# Altium PCB Alsoran PCB-20180114-version2.PcbDoc (part 2 of 4)
Units mil, origin at the board's own origin, x right, y up, seen from the top; angles counter-clockwise.
Board outline 15223.67 x 4104.31 mil, 2 copper layers (Top Layer, Bottom Layer); 293 components, 222 nets, 1561 pads, 240 vias.
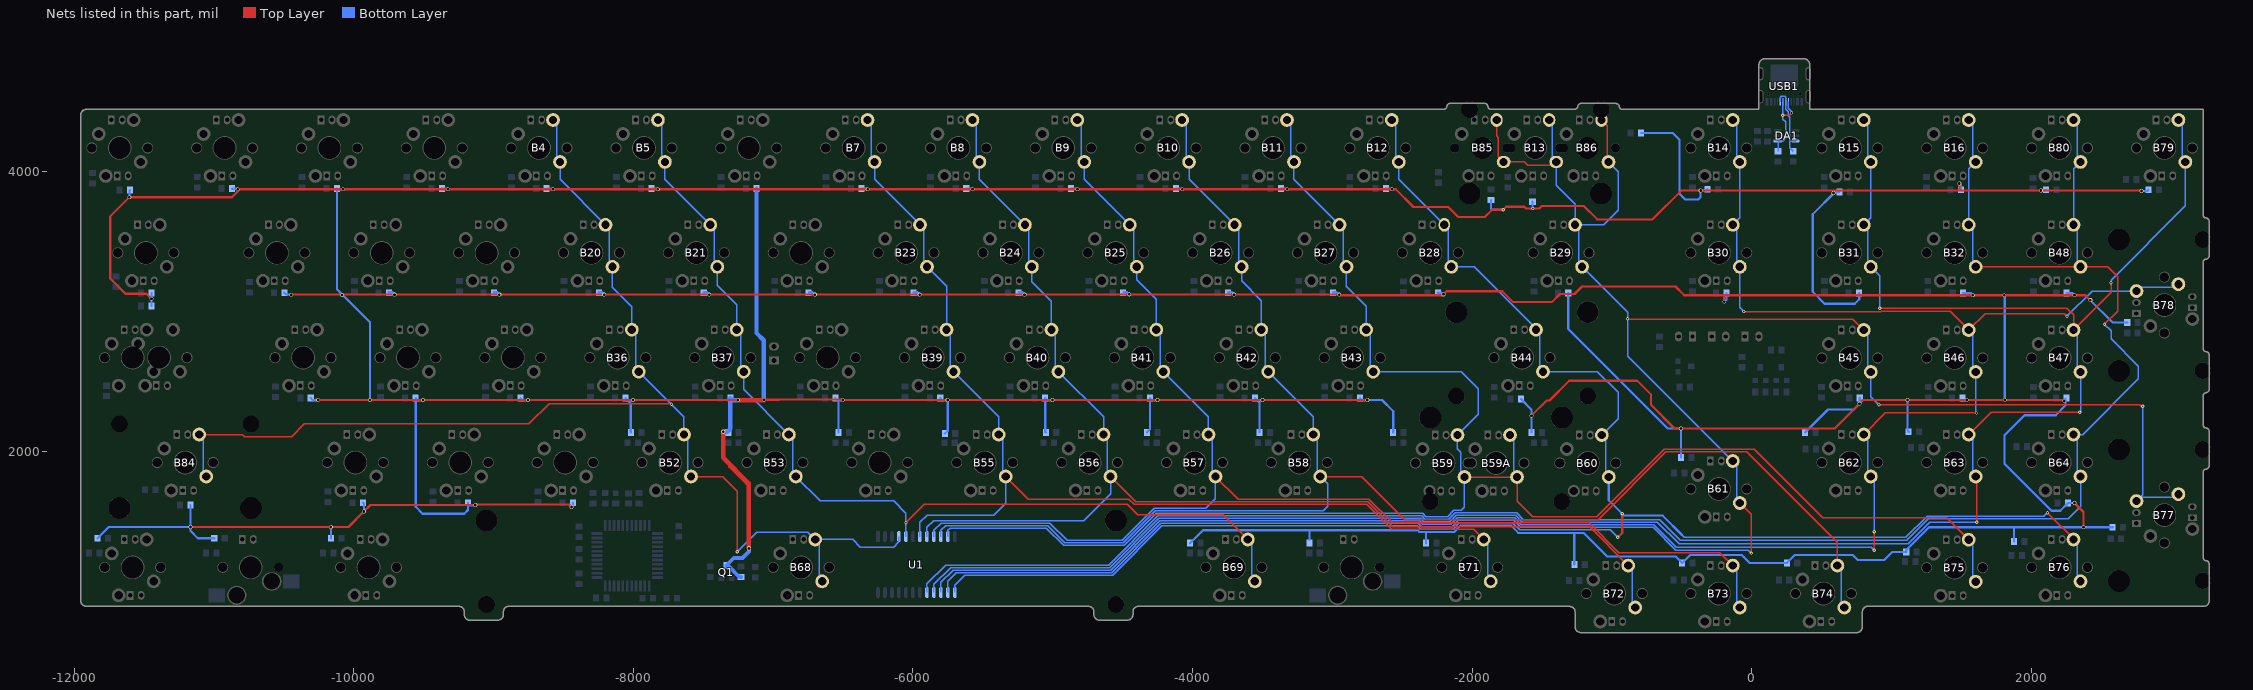
[diagram p2: the nets of this part, all layers, seen from the top]

## Via types
v1: diameter 23.62, hole 11.81, Top Layer to Bottom Layer, 150 vias
v2: diameter 27.56, hole 19.68, Top Layer to Bottom Layer, 63 vias
v3: diameter 39.37, hole 23.62, Top Layer to Bottom Layer, 12 vias
v4: diameter 24.41, hole 11.81, Top Layer to Bottom Layer, tented both sides, 10 vias
v5: diameter 23.62, hole 11.81, Top Layer to Bottom Layer, tented both sides, 3 vias
v6: diameter 31.5, hole 19.68, Top Layer to Bottom Layer, 2 vias

## Nets (pads, with @x,y where several pads share a name; then routed paths per layer and width w, separated by ;. In a path a pad name is that pad's centre, name@x,y a point inside that pad or via, vN(x,y) a via of type N, cw(c..) or ccw(c..) an arc to the next point about the centre after c; other vN are vias at no path point) (continued)
COL_4: B4.1 B20.1 B36.1 B52.1 B68.1 B84.1 U1.4 | length 9202.7
  Top Layer w10: B84.1@-11104.72,2119.29 -10796.65,2119.29 -10780.83,2103.46 -10443.78,2103.46 -10352.36,2194.88 -8746.64,2194.88 -8602.94,2338.58 -7730.31,2338.58 v1(-7726.78,2335.05) ; B52.1@-7587.53,1819.29 -7360.63,1819.29 -7255.91,1714.57 v1(-7255.91,1281.5)
  Bottom Layer w10: B84.1@-11104.72,2119.29 -11076.77,2091.34 -11076.77,1841.34 B84.1@-11054.72,1819.29 ; B4.1@-8573.89,4369.29 -8545.93,4341.34 -8545.93,4091.34 B4.1@-8523.89,4069.29 -8523.89,3943.91 B20.1@-8199.26,3619.29 -8171.31,3591.34 -8171.31,3341.34 B20.1@-8149.26,3319.29 -8149.26,3172.88 -8011.02,3034.65 -8011.02,2970.62 B36.1@-8011.02,2869.29 -7983.07,2841.34 -7983.07,2591.34 B36.1@-7961.02,2569.29 -7637.53,2245.8 B52.1@-7637.53,2119.29 -7609.58,2091.34 -7609.58,1841.34 B52.1@-7587.53,1819.29 ; v1(-7255.91,1281.5) -7116.14,1421.26 -6889.75,1421.26 -6751.18,1421.26 B68.1@-6699.21,1369.29 ; B68.1@-6649.21,1069.29 -6671.26,1091.34 -6671.26,1341.34 B68.1@-6699.21,1369.29 ; U1.4@-6100,1389.76 -6100,1351.38 -6136.42,1314.96 -6375.98,1314.96 -6430.32,1369.29 B68.1@-6699.21,1369.29
COL_5: B5.1 B21.1 B37.1 B53.1 B69.1 U1.5 | length 6991
  Top Layer w10: v1(-6050,1488.19) -5918.11,1620.08 -4468.48,1620.08 -4393.68,1545.28 -3780.71,1545.28 B69.1@-3604.72,1369.29
  Bottom Layer w10: B5.1@-7824.05,4369.29 -7796.1,4341.34 -7796.1,4091.34 B5.1@-7774.05,4069.29 -7774.05,3944.06 B21.1@-7449.28,3619.29 -7421.33,3591.34 -7421.33,3341.34 B21.1@-7399.28,3319.29 -7399.28,3186.68 -7260.63,3048.03 B37.1@-7260.63,2869.29 -7232.68,2841.34 -7232.68,2591.34 B37.1@-7210.63,2569.29 -7210.63,2442.61 B53.1@-6887.31,2119.29 -6859.36,2091.34 -6859.36,1841.34 B53.1@-6837.31,1819.29 -6662.2,1644.17 -6138.27,1644.17 -6050,1555.91 v1(-6050,1488.19) U1.5@-6050,1389.76 -6050,1435 ; B69.1@-3604.72,1369.29 -3576.77,1341.34 -3576.77,1091.34 B69.1@-3554.72,1069.29
COL_7: B7.1 B23.1 B39.1 B55.1 B71.1 U1.7 | length 7847.9
  Top Layer w10: B55.1@-5336.88,1819.29 -5174.8,1657.22 -4455.06,1657.22 -4417.77,1619.92 -2753.27,1619.92 -2574.14,1440.79 -1989.21,1440.79 B71.1@-1917.72,1369.29
  Bottom Layer w10: B7.1@-6324.38,4369.29 -6296.42,4341.34 -6296.42,4091.34 B7.1@-6274.38,4069.29 -6274.38,3944.36 B23.1@-5949.31,3619.29 -5921.36,3591.34 -5921.36,3341.34 B23.1@-5899.31,3319.29 -5759.84,3179.82 B39.1@-5759.84,2869.29 -5731.89,2841.34 -5731.89,2591.34 B39.1@-5709.84,2569.29 -5386.88,2246.33 B55.1@-5386.88,2119.29 -5358.92,2091.34 -5358.92,1841.34 B55.1@-5336.88,1819.29 -5336.88,1627.69 -5421.26,1543.31 -5897.64,1543.31 -5950,1490.94 U1.7@-5950,1389.76 ; B71.1@-1917.72,1369.29 -1889.76,1341.34 -1889.76,1091.34 B71.1@-1867.72,1069.29
COL_8: B8.1 B24.1 B40.1 B56.1 B72.1 U1.8 | length 8948.1
  Top Layer w10: B56.1@-4586.66,1819.29 -4405.16,1637.8 -2879.92,1637.8 ; -2948.82,1637.8 -2879.92,1637.8 ; B72.1@-884.25,1182.28 -1160.63,1458.66 -2566.73,1458.66 -2745.87,1637.8 -2879.92,1637.8
  Bottom Layer w10: U1.8@-5900,1389.76 -5900,1456.3 -5851.89,1504.41 -5200.78,1504.41 ; B8.1@-5574.54,4369.29 -5546.59,4341.34 -5546.59,4091.34 B8.1@-5524.54,4069.29 -5524.54,3944.51 B24.1@-5199.33,3619.29 -5171.37,3591.34 -5171.37,3341.34 B24.1@-5149.33,3319.29 -5149.33,3212.32 -5009.45,3072.44 B40.1@-5009.45,2869.29 -4981.5,2841.34 -4981.5,2591.34 B40.1@-4959.45,2569.29 -4636.66,2246.5 B56.1@-4636.66,2119.29 -4608.71,2091.34 -4608.71,1841.34 B56.1@-4586.66,1819.29 -4586.66,1694.84 -4777.09,1504.41 -5200.78,1504.41 ; -5170.85,1504.41 -5200.78,1504.41 ; B72.1@-884.25,1182.28 -856.3,1154.33 -856.3,904.33 B72.1@-834.25,882.28
COL_9: B9.1 B25.1 B41.1 B57.1 B73.1 U1.9 | length 9876.8
  Top Layer w10: B57.1@-3836.44,1819.29 -3672.82,1655.67 -2738.46,1655.67 -2570.08,1487.28 -1163.97,1487.28 -952.28,1275.59 -564.96,1275.59 ; -385.83,1275.59 -564.96,1275.59 ; B73.1@-136.22,1182.28 -229.53,1275.59 -564.96,1275.59
  Bottom Layer w10: U1.9@-5850,1389.76 -5850,1435 -5798.47,1486.54 -5753.94,1486.54 -5202.75,1486.54 ; -5163.45,1486.54 -5202.75,1486.54 ; B9.1@-4824.71,4369.29 -4796.75,4341.34 -4796.75,4091.34 B9.1@-4774.71,4069.29 -4774.71,3944.65 B25.1@-4449.34,3619.29 -4421.39,3591.34 -4421.39,3341.34 B25.1@-4399.34,3319.29 -4399.34,3226.12 -4259.06,3085.83 B41.1@-4259.06,2869.29 -4231.1,2841.34 -4231.1,2591.34 B41.1@-4209.06,2569.29 -3886.44,2246.68 B57.1@-3886.44,2119.29 -3858.49,2091.34 -3858.49,1841.34 B57.1@-3836.44,1819.29 -3836.44,1660.12 -3905.81,1590.75 -4273.43,1590.75 -4501.97,1362.2 -4897.64,1362.2 -5021.97,1486.54 -5202.75,1486.54 ; B73.1@-136.22,1182.28 -108.27,1154.33 -108.27,904.33 B73.1@-86.22,882.28
COL_10: B10.1 B26.1 B42.1 B58.1 B74.1 U1.10 | length 10997.7
  Top Layer w10: B58.1@-3086.22,1819.29 -2791.73,1819.29 -2482.6,1510.16 -1100.08,1510.16 -614.17,1996.06 -35.43,1996.06 611.81,1348.82 B74.1@611.81,1182.28
  Bottom Layer w10: U1.10@-5800,1389.76 -5800,1435 -5766.34,1468.66 -5190.94,1468.66 ; -5156.04,1468.66 -5190.94,1468.66 ; B10.1@-4074.87,4369.29 -4046.92,4341.34 -4046.92,4091.34 B10.1@-4024.87,4069.29 -4024.87,3944.8 B26.1@-3699.36,3619.29 -3671.41,3591.34 -3671.41,3341.34 B26.1@-3649.36,3319.29 -3649.36,3218.26 -3508.66,3077.56 B42.1@-3508.66,2869.29 -3480.71,2841.34 -3480.71,2591.34 B42.1@-3458.66,2569.29 -3136.22,2246.85 B58.1@-3136.22,2119.29 -3108.27,2091.34 -3108.27,1841.34 B58.1@-3086.22,1819.29 -3033.46,1766.53 -3033.46,1606.3 -3066.89,1572.87 -3263.15,1572.87 -4266.02,1572.87 -4494.56,1344.33 -4913.23,1344.33 -5037.56,1468.66 -5190.94,1468.66 ; B74.1@611.81,1182.28 639.76,1154.33 639.76,904.33 B74.1@661.81,882.28
COL_11: B11.1 B27.1 B43.1 B59.1 B59A.1 B75.1 U1.11 | length 12748.7
  Top Layer w10: B59.1@-2055.41,1815.8 B59A.1@-1679.32,1815.8 -1679.32,1643.89 -1566.93,1531.5 -1108.27,1531.5 -625.83,2013.94 15.59,2013.94 505.91,1523.62 744.09,1523.62 ; 789.37,1523.62 744.09,1523.62 ; 1165.68,1523.62 1157.48,1523.62 ; B75.1@1550.79,1367.32 1394.49,1523.62 1157.48,1523.62 ; 744.09,1523.62 1157.48,1523.62
  Bottom Layer w10: U1.11@-5750,1389.76 -5750,1435 -5734.22,1450.79 -5194.87,1450.79 ; -5148.64,1450.79 -5194.87,1450.79 ; B11.1@-3325.03,4369.29 -3297.08,4341.34 -3297.08,4091.34 B11.1@-3275.03,4069.29 -3275.03,3944.95 B27.1@-2949.38,3619.29 -2921.42,3591.34 -2921.42,3341.34 B27.1@-2899.38,3319.29 -2899.38,3178.9 -2758.27,3037.8 B43.1@-2758.27,2869.29 -2730.31,2841.34 -2730.31,2591.34 B43.1@-2708.27,2569.29 -2401.97,2569.29 -2078.93,2569.29 -1958.06,2448.42 -1958.06,2263.15 B59.1@-2105.41,2115.8 -2105.41,2016.14 -2081.56,1992.29 -2081.56,1841.95 B59.1@-2055.41,1815.8 -2055.41,1600.1 -2078.86,1576.65 -2130.26,1576.65 -2173.92,1532.99 -2332.61,1532.99 -2354.62,1555 -4258.62,1555 -4487.16,1326.46 -4920.63,1326.46 -5044.96,1450.79 -5194.87,1450.79 ; B59A.1@-1729.32,2115.8 -1701.37,2087.84 -1701.37,1837.84 B59A.1@-1679.32,1815.8 ; B75.1@1550.79,1367.32 1578.74,1339.37 1578.74,1089.37 B75.1@1600.79,1067.32
COL_12: B12.1 B28.1 B44.1 B60.1 B76.1 U1.13 | length 13432.1
  Top Layer w10: v1(2114.17,1561.02) 2300.79,1374.41 B76.1@2300.79,1369.29
  Top Layer w15.75: v1(-958.66,1383.86) -927.17,1415.35 v1(-927.17,1553.15)
  Bottom Layer w10: U1.13@-5700,989.76 -5700,1043.11 -5628.94,1114.17 ; -5152.74,1114.17 -5628.94,1114.17 ; B12.1@-2575.2,4369.29 -2547.25,4341.34 -2547.25,4091.34 B12.1@-2525.2,4069.29 -2525.2,3945.1 B28.1@-2199.39,3619.29 -2171.44,3591.34 -2171.44,3341.34 B28.1@-2149.39,3319.29 -1986.93,3319.29 -1543.7,2876.07 B44.1@-1543.7,2869.29 -1515.75,2841.34 -1515.75,2591.34 B44.1@-1493.7,2569.29 -1103.99,2569.29 -955.3,2420.6 -955.3,2233.72 B60.1@-1073.23,2115.8 -1045.28,2087.84 B60.1@-1045.28,1837.84 ; -1153.7,1436.85 -1222.44,1436.85 ; v1(-958.66,1383.86) -1011.65,1436.85 -1222.44,1436.85 ; -500,1401.57 -482.28,1383.86 1102.36,1383.86 1253.94,1535.43 2088.58,1535.43 v1(2114.17,1561.02) ; B76.1@2300.79,1369.29 2328.74,1341.34 2328.74,1091.34 B76.1@2350.79,1069.29 ; -5628.94,1114.17 -4570.15,1114.17 -4218.69,1465.63 -2391.64,1465.63 -2369.63,1443.62 -2136.9,1443.62 -2093.24,1487.28 -1711.88,1487.28 -1661.45,1436.85 -1222.44,1436.85
  Bottom Layer w15.75: B60.1@-1023.23,1815.8 -1023.23,1649.21 v1(-927.17,1553.15) ; v1@-930.12,1550.2 -919.29,1539.37 -637.8,1539.37 -500,1401.57
COL_13: B13.1 B29.1 B45.1 B61.1 B77.1 B85.1 B86.1 U1.14 | length 16882.6
  Top Layer w10: B85.1@-1825.36,4369.29 -1825.36,4256.36 -1812,4243 -1812,4105.93 B85.1@-1775.36,4069.29 -1628.29,4069.29 -1604,4045 -1423.5,4045 B13.1@-1399.21,4069.29 ; B86.1@-1075.53,4369.29 -1035,4328.76 -1035,4069.29 B86.1@-1025.53,4069.29 ; v1@-888.88,2944.88 723.23,2944.88 B45.1@800.79,2867.32 ; B61.1@-86.22,1630.31 -3.94,1548.03 v1(-3.94,1271.65) ; v1(909.45,2332.68) 2775.59,2332.68 2789.37,2318.9 2791.34,2318.9 v1(2795.28,2322.83)
  Bottom Layer w10: U1.14@-5750,989.76 -5750,1070.87 -5688.82,1132.05 -5198.81,1132.05 ; -5160.14,1132.05 -5198.81,1132.05 ; B13.1@-1449.21,4369.29 -1429,4349.08 -1429,4099.08 B13.1@-1399.21,4069.29 -1399.21,3903.01 -1264.17,3767.97 B29.1@-1264.17,3619.29 ; -1199.76,1454.72 -1238.19,1454.72 ; B86.1@-1025.53,4069.29 -954,3997.76 -954,3723 -1057.71,3619.29 B29.1@-1264.17,3619.29 ; B61.1@-86.22,1630.31 -108.27,1652.36 -108.27,1902.36 B61.1@-136.22,1930.31 -138.98,1930.31 -888.88,2680.22 -888.88,2994 B29.1@-1214.17,3319.29 -1236.22,3341.34 -1236.22,3591.34 B29.1@-1264.17,3619.29 ; v1(-3.94,1271.65) -25.59,1293.31 -545.28,1293.31 -706.69,1454.72 -1238.19,1454.72 ; B45.1@800.79,2867.32 828.74,2839.37 828.74,2589.37 B45.1@850.79,2567.32 850.79,2391.34 v1(909.45,2332.68) ; v1(2795.28,2322.83) 2795.28,1687.8 B77.1@2750.79,1643.31 2778.74,1671.26 3028.74,1671.26 B77.1@3050.79,1693.31 ; -5198.81,1132.05 -4577.55,1132.05 -4226.1,1483.5 -2384.23,1483.5 -2362.23,1461.5 -2144.3,1461.5 -2100.64,1505.16 -1704.47,1505.16 -1654.04,1454.72 -1238.19,1454.72
  other v1: -888.88,2946.85
COL_14: B14.1 B30.1 B46.1 B62.1 B78.1 U1.15 | length 14183.6
  Top Layer w10: v1(-57.09,3000) -56.02,2998.94 925.58,2998.94 926.64,3000 1418.11,3000 B46.1@1550.79,2867.32 1667.72,2984.25 2234.25,2984.25 v1(2253.94,2964.57) ; B62.1@800.79,2119.29 955.12,2273.62 v1(1606.3,2273.62) ; B62.1@850.79,1819.29 B62.1@875.98,1794.09 ; v1(875.98,1291.34) v1(875.98,1423.23)
  Bottom Layer w10: U1.15@-5800,989.76 -5800,1062.2 -5712.28,1149.92 -4584.96,1149.92 -4233.5,1501.38 -2376.83,1501.38 -2354.82,1479.37 -2151.71,1479.37 -2108.05,1523.03 -1697.07,1523.03 -1648.45,1474.41 -1226.38,1474.41 ; -1205.35,1474.41 -1226.38,1474.41 ; B14.1@-136.22,4369.29 -108.27,4341.34 -108.27,4091.34 B14.1@-86.22,4069.29 -86.22,3669.29 B30.1@-136.22,3619.29 -108.27,3591.34 -108.27,3341.34 B30.1@-86.22,3319.29 -86.22,3029.13 v1(-57.09,3000) ; B62.1@800.79,2119.29 828.74,2091.34 B62.1@828.74,1841.34 ; B62.1@850.79,1819.29 875.98,1794.09 v1(875.98,1423.23) ; v1(875.98,1291.34) 852.36,1314.96 -541.65,1314.96 -701.1,1474.41 -1226.38,1474.41 ; B46.1@1550.79,2867.32 1578.74,2839.37 1578.74,2589.37 B46.1@1600.79,2567.32 1600.79,2279.13 v1(1606.3,2273.62) ; v1(2253.94,2964.57) 2434.65,3145.28 B78.1@2750.79,3145.28 2778.74,3173.23 3028.74,3173.23 B78.1@3050.79,3195.28
COL_15: B15.1 B31.1 B47.1 B63.1 B79.1 U1.16 | length 14905
  Top Layer w10: v1(915.35,3023.62) 2253.94,3023.62 2300.79,2976.77 B47.1@2300.79,2867.32 2568.9,3135.43 v1(2568.9,3204.72) ; B63.1@1550.79,2119.29 1711.02,2279.53 v1(2344.49,2279.53) ; B63.1@1600.79,1819.29 1608.27,1811.81 v1(1608.27,1492.13)
  Bottom Layer w10: U1.16@-5850,989.76 -5850,1047.64 -5729.84,1167.8 -4592.36,1167.8 -4240.9,1519.25 -2369.43,1519.25 -2347.42,1497.24 -2159.11,1497.24 -2115.45,1540.91 -1689.67,1540.91 -1641.05,1492.28 -1238.19,1492.28 ; -1212.75,1492.28 -1238.19,1492.28 ; B15.1@800.79,4369.29 828.74,4341.34 828.74,4091.34 B15.1@850.79,4069.29 850.79,3669.29 B31.1@800.79,3619.29 828.74,3591.34 828.74,3341.34 B31.1@850.79,3319.29 915.35,3254.72 v1(915.35,3023.62) ; B63.1@1550.79,2119.29 1578.74,2091.34 1578.74,1841.34 B63.1@1600.79,1819.29 ; v1(1608.27,1492.13) 1273.81,1492.13 1118.3,1336.61 -519.69,1336.61 -675.35,1492.28 -1238.19,1492.28 ; B47.1@2300.79,2867.32 2328.74,2839.37 2328.74,2589.37 B47.1@2350.79,2567.32 2350.79,2285.83 v1(2344.49,2279.53) ; v1(2568.9,3204.72) 2568.9,3222.44 ; 2616.14,3269.69 2568.9,3222.44 ; B79.1@3050.79,4369.29 3078.74,4341.34 3078.74,4091.34 B79.1@3100.79,4069.29 3100.79,3754.33 2568.9,3222.44
COL_16: B16.1 B32.1 B48.1 B64.1 B80.1 U1.17 | length 14047.3
  Top Layer w10: B32.1@1600.79,3319.29 B48.1@2350.79,3319.29 2544.88,3319.29 2616.14,3248.03 2616.14,3001.97 v1(2521.65,2907.48)
  Bottom Layer w10: U1.17@-5900,989.76 -5900,1050.79 -5765.12,1185.67 -4599.76,1185.67 -4248.31,1537.13 -2362.02,1537.13 -2340.01,1515.12 -2166.52,1515.12 -2122.85,1558.78 -1682.26,1558.78 -1633.64,1510.16 -1244.09,1510.16 ; -1220.16,1510.16 -1244.09,1510.16 ; B16.1@1550.79,4369.29 1578.74,4341.34 1578.74,4091.34 B16.1@1600.79,4069.29 1550.79,4019.29 B32.1@1550.79,3619.29 1578.74,3591.34 1578.74,3341.34 B32.1@1600.79,3319.29 ; B80.1@2300.79,4369.29 2328.74,4341.34 2328.74,4091.34 B80.1@2350.79,4069.29 2300.79,4019.29 B48.1@2300.79,3619.29 2328.74,3591.34 2328.74,3341.34 B48.1@2350.79,3319.29 ; v1(2521.65,2907.48) 2568.9,2860.24 2568.9,2803.9 2764.7,2608.1 2764.7,2517.2 2366.79,2119.29 B64.1@2300.79,2119.29 2328.74,2091.34 2328.74,1841.34 B64.1@2350.79,1819.29 2350.79,1606.69 2261.65,1517.56 1261.34,1517.56 1107.95,1364.17 -511.81,1364.17 -657.8,1510.16 -1244.09,1510.16
D+: DA1.1 R94.1 USB1.A6 USB1.B6 | length 575.8
  Top Layer w10: v1(221.99,4403.54) 267.72,4403.54 285.43,4421.26 v1(283.46,4419.28)
  Bottom Layer w10: R94.1@187.99,4145.67 187.99,4216.54 DA1.1@186.02,4218.5 222.44,4218.5 241.14,4237.2 241.14,4355.32 221.99,4374.46 v1(221.99,4403.54) USB1.A6@221.99,4500.13 ; USB1.B6@261.36,4500.13 261.36,4453.2 289.37,4425.2 285.43,4421.26 v1(283.46,4419.28)
D-: DA1.6 R93.1 USB1.A7 USB1.B7 | length 525.2
  Bottom Layer w10: USB1.B7@203.13,4500.13 203.13,4529.99 211.74,4538.59 232.25,4538.59 ; 272.64,4218.5 DA1.6@312.5,4218.5 ; R93.1@296.26,4145.67 270.1,4171.83 270.1,4388.5 258.78,4399.82 258.78,4428.23 241.68,4445.33 241.68,4500.13 241.68,4531.94 235.64,4537.98 233.69,4537.98 ; 232.25,4538.59 232.86,4537.98 233.69,4537.98 ; 232.25,4538.59 233.07,4538.59 233.69,4537.98
LCOL: Q1.3 R8.1 R9.1 R10.1 R11.1 R12.1 R13.1 R14.1 R15.1 R16.1 R17.1 R18.1 R19.1 R20.1 R21.1 R22.1 R23.1 R24.1 R25.1 R26.1 R27.1 R28.1 R29.1 R30.1 R31.1 R32.1 R33.1 R34.1 R35.1 R36.1 R37.1 R38.1 R39.1 R41.1 R42.1 R43.1 R44.1 R45.1 R46.1 R47.1 R48.1 R49.1 R50.1 R51.1 R52.1 R53.1 R54.1 R55.1 R56.1 R57.1 R58.1 R59.1 R60.1 R61.1 R62.1 R63.1 R64.1 R65.1 R66.1 R67.1 R68.1 R69.1 R70.1 R71.1 R72.1 R73.1 R74.1 R75.1 R76.1 R77.1 R78.1 R79.1 R80.1 R81.1 R82.1 R83.1 R84.1 R85.1 R86.1 R87.1 R88.1 R89.1 R90.1 R91.1 R92.1 R96.1 R97.1 | length 69687.4
  Top Layer w15.75: v2(-11446.85,3090.55) -11482.29,3125.98 -11631.89,3125.98 -11741.34,3235.43 -11741.34,3679.92 v2(-11604.33,3816.93) -10870.06,3816.93 v2@-10820.86,3866.13 ; v2(-11167.32,1458.66) v2(-10163.39,1458.66) -10037.4,1458.66 v2(-9927.17,1568.9) -9879.92,1616.14 v2(-9129.7,1616.14) ; -10812.97,3874.02 v2(-10076.77,3874.02) v2(-9324.8,3874.02) v2(-8574.62,3874.02) v2(-7824.45,3874.02) v2(-6324.09,3874.02) v2(-5573.91,3874.02) v2(-4823.73,3874.02) v2(-4073.55,3874.02) v2(-3323.37,3874.02) v2(-2573.19,3874.02) -2547.17,3874.02 -2419.53,3746.38 -2170.38,3746.38 -2099,3675 -1909.55,3675 -1857.55,3727 v4(-1778.79,3727) -1756.87,3748.92 -1627.92,3748.92 -1615,3736 v4(-1568.15,3736) -1521,3736 -1503.75,3753.25 -1200.5,3753.25 -1105.54,3658.3 -710.1,3658.3 -504.23,3864.17 v2(-366.14,3864.17) 578.74,3864.17 ; v2@-10446.12,3122.05 v2(-4453.19,3122.05) v2@-2950.79,3122.05 ; v2(-10253.94,2366.14) v2(-9883.86,2366.14) v2(-9503.54,2366.14) v2(-8753.15,2366.14) v2(-8002.76,2366.14) v2(-7252.36,2366.14) ; v2@-9127.39,1618.45 -8460.19,1618.45 v2(-8442.91,1601.18) ; -7313.97,1888.77 -7191.92,1766.72 ; v2@-7066.93,2366.14 v2(-7064.96,2368.11) -6958.27,2368.11 -6956.3,2370.08 -6505.91,2370.08 v2@-6503.94,2368.11 ; v2(-6501.97,2366.14) v2(-5751.57,2366.14) v2(-5001.18,2366.14) v2(-4250.79,2366.14) v2(-3500.39,2366.14) v2(-2750,2366.14) ; v2@-2946.85,3116.14 v2@-2204.72,3116.14 ; v2(-2204.9,3122.2) -2182.22,3144.88 -1785.31,3144.88 -1707.05,3066.62 -1430.7,3066.62 -1372.3,3125.02 -1268.4,3125.02 -1214.84,3178.58 -545.96,3178.58 -483.52,3116.14 v2(1580.71,3116.14) v2(1805.11,3116.14) v2(2307.09,3116.14) 2385.83,3116.14 v2(2421.26,3080.71) ; v2(-1576.77,2253.94) -1467.55,2363.16 -1447.74,2363.16 -1306.2,2504.7 -820.6,2504.7 -720.47,2404.57 -720.47,2330.71 -553.15,2163.39 v2(-505.91,2163.39) 592.52,2163.39 v2(769.69,2340.55) 795.28,2366.14 v2(1114.17,2366.14) v2(1537.4,2366.14) v2(1809.06,2366.14) v2@2228.35,2366.14 ; v2(-196.85,3068.9) -196.85,3112.2 ; 584.65,3864.17 v2(2066.93,3864.17) v2@2785.43,3864.17 ; 1484.25,3868.11 v2(1484.25,3915.35) ; v2(2307.09,1629.92) 2372.05,1564.96 v2(2372.05,1456.69)
  Top Layer w31.5: v6(-7356.3,2139.76) -7356.3,1952.87 -7173.23,1769.8 -7173.23,1305.82 v6(-7172.59,1305.18) ; v2(-7252.36,2366.14) v2@-7066.93,2366.14
  Bottom Layer w15.75: R73.1@-11832.68,1377.95 -11751.97,1458.66 v2(-11167.32,1458.66) ; v2(-11604.33,3816.93) -11604.33,3864.17 R89.1@-11600.39,3868.11 ; R91.1@-11446.85,3039.37 v2(-11446.85,3090.55) R90.1@-11446.85,3131.89 ; R92.1@-11167.32,1616.14 v2(-11167.32,1458.66) ; R74.1@-10997.05,1377.95 -11114.17,1377.95 -11167.32,1431.1 v2(-11167.32,1458.66) ; R8.1@-10870.08,3877.95 v2@-10832.68,3877.95 ; R24.1@-10496.06,3133.86 -10484.25,3122.05 v2@-10446.12,3122.05 ; R41.1@-10307.09,2379.92 -10291.34,2364.17 v2@-10255.91,2364.17 ; v2@-10163.39,1444.88 v2(-10163.39,1458.66) ; R75.1@-10161.42,1377.95 -10161.42,1442.91 ; R22.1@-10119.9,3877.95 -10119.9,3159.27 -9883.86,2923.23 v2(-9883.86,2366.14) ; R22.1@-10115.96,3874.02 v2(-10076.77,3874.02) ; R57.1@-9933.07,1631.89 -9927.17,1625.98 v2(-9927.17,1568.9) ; R25.1@-9748.82,3137.8 -9723.23,3137.8 -9721.26,3135.83 v2@-9707.48,3125.98 ; v2@-9505.51,2364.17 -9540.94,2364.17 R42.1@-9556.69,2379.92 -9556.69,1601.97 -9507.87,1553.15 -9208.66,1553.15 -9182.68,1579.13 R58.1@-9182.68,1631.89 ; R9.1@-9369.72,3877.95 v2@-9328.74,3877.95 ; R58.1@-9167.1,1614.17 v2@-9131.67,1614.17 ; R26.1@-8999.34,3137.8 -8973.74,3137.8 -8971.78,3135.83 v2@-8958,3125.98 ; R43.1@-8806.3,2379.92 -8790.55,2364.17 v2@-8755.12,2364.17 ; R10.1@-8619.54,3877.95 v2@-8578.56,3877.95 ; v2(-8442.91,1601.18) -8432.28,1611.81 R59.1@-8432.28,1629.57 ; R59.1@-8432.63,1629.92 R59.1@-8432.28,1629.57 ; R59.1@-8432.28,1631.89 R59.1@-8432.28,1629.57 ; R27.1@-8249.85,3137.8 -8224.26,3137.8 -8222.29,3135.83 v2@-8208.51,3125.98 ; R60.1@-8017.72,2133.86 -8017.72,2341.73 R44.1@-8055.91,2379.92 -8040.16,2364.17 v2@-8004.72,2364.17 ; R11.1@-7869.36,3877.95 v2@-7828.38,3877.95 ; R28.1@-7498.39,3137.8 -7472.8,3137.8 -7470.83,3135.83 v2@-7457.05,3125.98 ; R29.1@-6743,3137.8 -6717.41,3137.8 ; -6715.44,3135.83 v2@-6701.66,3125.98 ; R46.1@-6555.12,2379.92 -6533.46,2358.27 R62.1@-6533.46,2133.86 ; R46.1@-6539.37,2364.17 v2@-6503.94,2364.17 ; R13.1@-6369.01,3877.95 v2@-6328.02,3877.95 ; R30.1@-5993.51,3137.8 -5967.92,3137.8 ; -5965.95,3135.83 v2@-5952.17,3125.98 ; R47.1@-5804.72,2379.92 -5788.98,2364.17 v2@-5753.54,2364.17 ; R63.1@-5772.24,2125.98 -5751.57,2146.65 v2(-5751.57,2366.14) ; R14.1@-5618.83,3877.95 v2@-5577.85,3877.95 ; R31.1@-5244.02,3137.8 -5218.43,3137.8 ; -5216.46,3135.83 v2@-5202.68,3125.98 ; R64.1@-5049.65,2133.86 -5054.33,2138.54 R48.1@-5054.33,2379.92 -5038.58,2364.17 v2@-5003.15,2364.17 ; R15.1@-4868.65,3877.95 v2@-4827.67,3877.95 ; R32.1@-4494.53,3137.8 -4468.94,3137.8 ; -4466.97,3135.83 v2@-4453.19,3125.98 ; R65.1@-4326.77,2133.86 -4303.94,2156.69 R49.1@-4303.94,2379.92 -4288.19,2364.17 v2@-4252.76,2364.17 ; R16.1@-4118.47,3877.95 v2@-4077.49,3877.95 ; R77.1@-4017.72,1342.52 -3926,1434.24 -3163.39,1434.24 ; R33.1@-3745.04,3137.8 -3719.45,3137.8 ; -3717.48,3135.83 v2@-3703.7,3125.98 ; R66.1@-3521.65,2133.86 -3521.65,2348.03 R50.1@-3553.54,2379.92 -3537.8,2364.17 v2@-3502.36,2364.17 ; R17.1@-3368.29,3877.95 v2@-3327.31,3877.95 ; R78.1@-3163.39,1366.14 -3163.39,1434.24 ; R34.1@-2995.55,3137.8 -2969.96,3137.8 ; -2967.99,3135.83 v2@-2954.21,3125.98 ; R51.1@-2803.15,2379.92 -2787.4,2364.17 v2@-2751.97,2364.17 ; v2(-2750,2366.14) -2645.67,2366.14 -2564.96,2285.43 R67.1@-2564.96,2133.86 ; R18.1@-2618.11,3877.95 v2@-2577.13,3877.95 ; R79.1@-2330.71,1342.52 -2330.71,1422.87 ; R35.1@-2246.06,3133.86 -2220.47,3133.86 ; -2218.51,3131.89 -2208.82,3122.2 v2(-2204.9,3122.2) ; R96.1@-1865.36,3795.96 -1865.36,3734.81 -1857.55,3727 v4(-1778.79,3727) ; R52.1@-1651.57,2374.02 -1576.77,2299.21 v2(-1576.77,2253.94) R68.1@-1576.77,2133.86 ; v4(-1568.15,3736) R19.1@-1568.15,3784.6 ; R36.1@-1312.99,3131.89 -1312.99,2874.79 -601.59,2163.39 v2(-505.91,2163.39) R69.1@-505.91,1954.72 ; R80.1@-1269.69,1188.98 -1269.69,1414.13 -1271.65,1416.1 ; R97.1@-793.6,4277 -567,4277 -517,4227 -517,3841 -477,3801 -383,3801 -366.14,3817.86 v2(-366.14,3864.17) -326.77,3864.17 R20.1@-316.93,3874.02 ; v2(-196.85,3068.9) -181.1,3084.65 R37.1@-181.1,3131.89 ; R70.1@379.92,2133.86 545.28,2299.21 728.35,2299.21 v2(769.69,2340.55) ; R21.1@625.98,3854.33 594.49,3854.33 435.04,3694.88 435.04,3139.76 519.69,3055.12 736.22,3055.12 767.72,3086.61 R38.1@767.72,3131.89 ; 771.65,2355.12 R53.1@771.65,2381.89 ; v2(1114.17,2366.14) 1114.17,2147.64 R71.1@1122.05,2139.76 ; R23.1@1496.06,3870.08 1496.06,3903.54 ; R39.1@1511.81,3131.89 1564.96,3131.89 v2(1580.71,3116.14) ; v2(1809.06,2366.14) v2@1809.06,3112.2 ; R84.1@1874.02,1354.33 1874.02,1448.82 1866.14,1456.69 ; v2(2066.93,3864.17) 2098.43,3864.17 R88.1@2104.33,3870.08 ; R55.1@2244.09,2375.98 2244.09,2328.74 2173.23,2257.87 1950.79,2257.87 1807.09,2114.17 1807.09,1911.42 2143.7,1574.8 2206.69,1574.8 R72.1@2261.81,1629.92 v2(2307.09,1629.92) ; R56.1@2251.97,3131.89 2291.34,3131.89 v2(2307.09,3116.14) ; v2(2421.26,3080.71) 2580.71,2921.26 R86.1@2685.04,2921.26 ; R85.1@2580.71,1456.69 v2(2372.05,1456.69) 1866.14,1456.69 ; v2(2787.4,3862.2) 2828.74,3862.2 R87.1@2836.61,3870.08 ; -3163.39,1434.24 -2389.59,1434.24 -2378.22,1422.87 -2330.71,1422.87 ; -2330.71,1422.87 -2128.31,1422.87 -2084.65,1466.54 -1720.47,1466.54 -1670.04,1416.1 -1271.65,1416.1 ; -1271.65,1416.1 -1203.5,1416.1 -1035.43,1248.03 -545.28,1248.03 R81.1@-498.03,1200.79 -440.94,1257.87 -72.83,1257.87 -15.75,1200.79 R82.1@250,1200.79 307.09,1257.87 722.44,1257.87 757.87,1222.44 946.85,1222.44 1003.94,1279.53 R83.1@1104.33,1279.53 1104.33,1293.31 1267.72,1456.69 1866.14,1456.69
  Bottom Layer w27.56: R76.1@-7228.59,1101.75 -7241.89,1101.75 -7311.98,1171.84 -7324.23,1171.84 Q1.3@-7335.08,1182.69 -7281.56,1236.22 -7218.5,1236.22 -7172.59,1282.13 v6(-7172.59,1305.18)
  Bottom Layer w31.5: v6(-7356.3,2139.76) -7326.77,2139.76 -7305.51,2161.02 R45.1@-7305.51,2379.92 -7291.73,2366.14 v2(-7252.36,2366.14) ; R12.1@-7119.18,3877.95 -7119.18,2845.56 -7066.93,2793.31 -7066.93,2370.08 v2(-7064.96,2368.11)
  other v2: 2234.25,2360.24 -10446.12,3118.11 -10082.68,3118.11 -9707.48,3120.08 -8958,3120.08 -8208.51,3120.08 -7457.05,3120.08 -6701.66,3120.08 -5952.17,3120.08 -5202.68,3120.08 -3703.7,3120.08 -2950.79,3120.08 584.65,3846.46 -10828.74,3874.02

## Text inside footprints (layer, text, board x,y; h text height)
B72: Bottom Overlay "+" at -1033.46,1137.8 h39.37 r180; Bottom Overlay "+" at -1013.78,822.83 h39.37
B73: Bottom Overlay "+" at -265.75,822.83 h39.37; Bottom Overlay "+" at -285.43,1137.8 h39.37 r180
B74: Bottom Overlay "+" at 482.28,822.83 h39.37; Bottom Overlay "+" at 462.6,1137.8 h39.37 r180
B75: Bottom Overlay "+" at 1421.26,1007.87 h39.37; Bottom Overlay "+" at 1401.57,1322.83 h39.37 r180
B76: Bottom Overlay "+" at 2151.57,1324.8 h39.37 r180; Bottom Overlay "+" at 2171.26,1009.84 h39.37
B77: Bottom Overlay "+" at 3110.24,1513.78 h39.37 r90; Bottom Overlay "+" at 2795.28,1494.09 h39.37 r270
B79: Bottom Overlay "+" at 2921.26,4009.84 h39.37; Bottom Overlay "+" at 2901.57,4324.8 h39.37 r180
B80: Bottom Overlay "+" at 2151.57,4324.8 h39.37 r180; Bottom Overlay "+" at 2171.26,4009.84 h39.37
B81: Bottom Overlay "+" at -11702.76,4009.84 h39.37; Bottom Overlay "+" at -11722.44,4324.8 h39.37 r180
B82: Bottom Overlay "+" at -11535.43,3574.8 h39.37 r180; Bottom Overlay "+" at -11515.75,3259.84 h39.37
B83: Bottom Overlay "+" at -11629.92,2824.8 h39.37 r180
B83A: Bottom Overlay "+" at -11440.94,2824.8 h39.37 r180; Bottom Overlay "+" at -11409.45,2392.46 h39.37
B84: Bottom Overlay "+" at -11253.94,2074.8 h39.37 r180; Bottom Overlay "+" at -11234.25,1759.84 h39.37
B85: Bottom Overlay "+" at -1954.89,4009.84 h39.37; Bottom Overlay "+" at -1974.58,4324.8 h39.37 r180
B86: Bottom Overlay "+" at -1205.05,4009.84 h39.37; Bottom Overlay "+" at -1224.74,4324.8 h39.37 r180
CapsLED1: Bottom Overlay "+" at -210.54,2757.87 h39.37
NumLED1: Bottom Overlay "+" at -500.51,2883.86 h39.37 r180
ScorllLED1: Bottom Overlay "+" at 26.66,2757.87 h39.37